# Altium PCB PWR612A.PcbDoc (part 2 of 2)
Units mil, origin at the board's own origin, x right, y up, seen from the top; angles counter-clockwise.
Board outline 6150 x 4600 mil, 4 copper layers (Top Layer, MidLayer1, MidLayer2, Bottom Layer), stack 91.2 mil thick; 131 components, 120 nets, 496 pads, 150 vias.
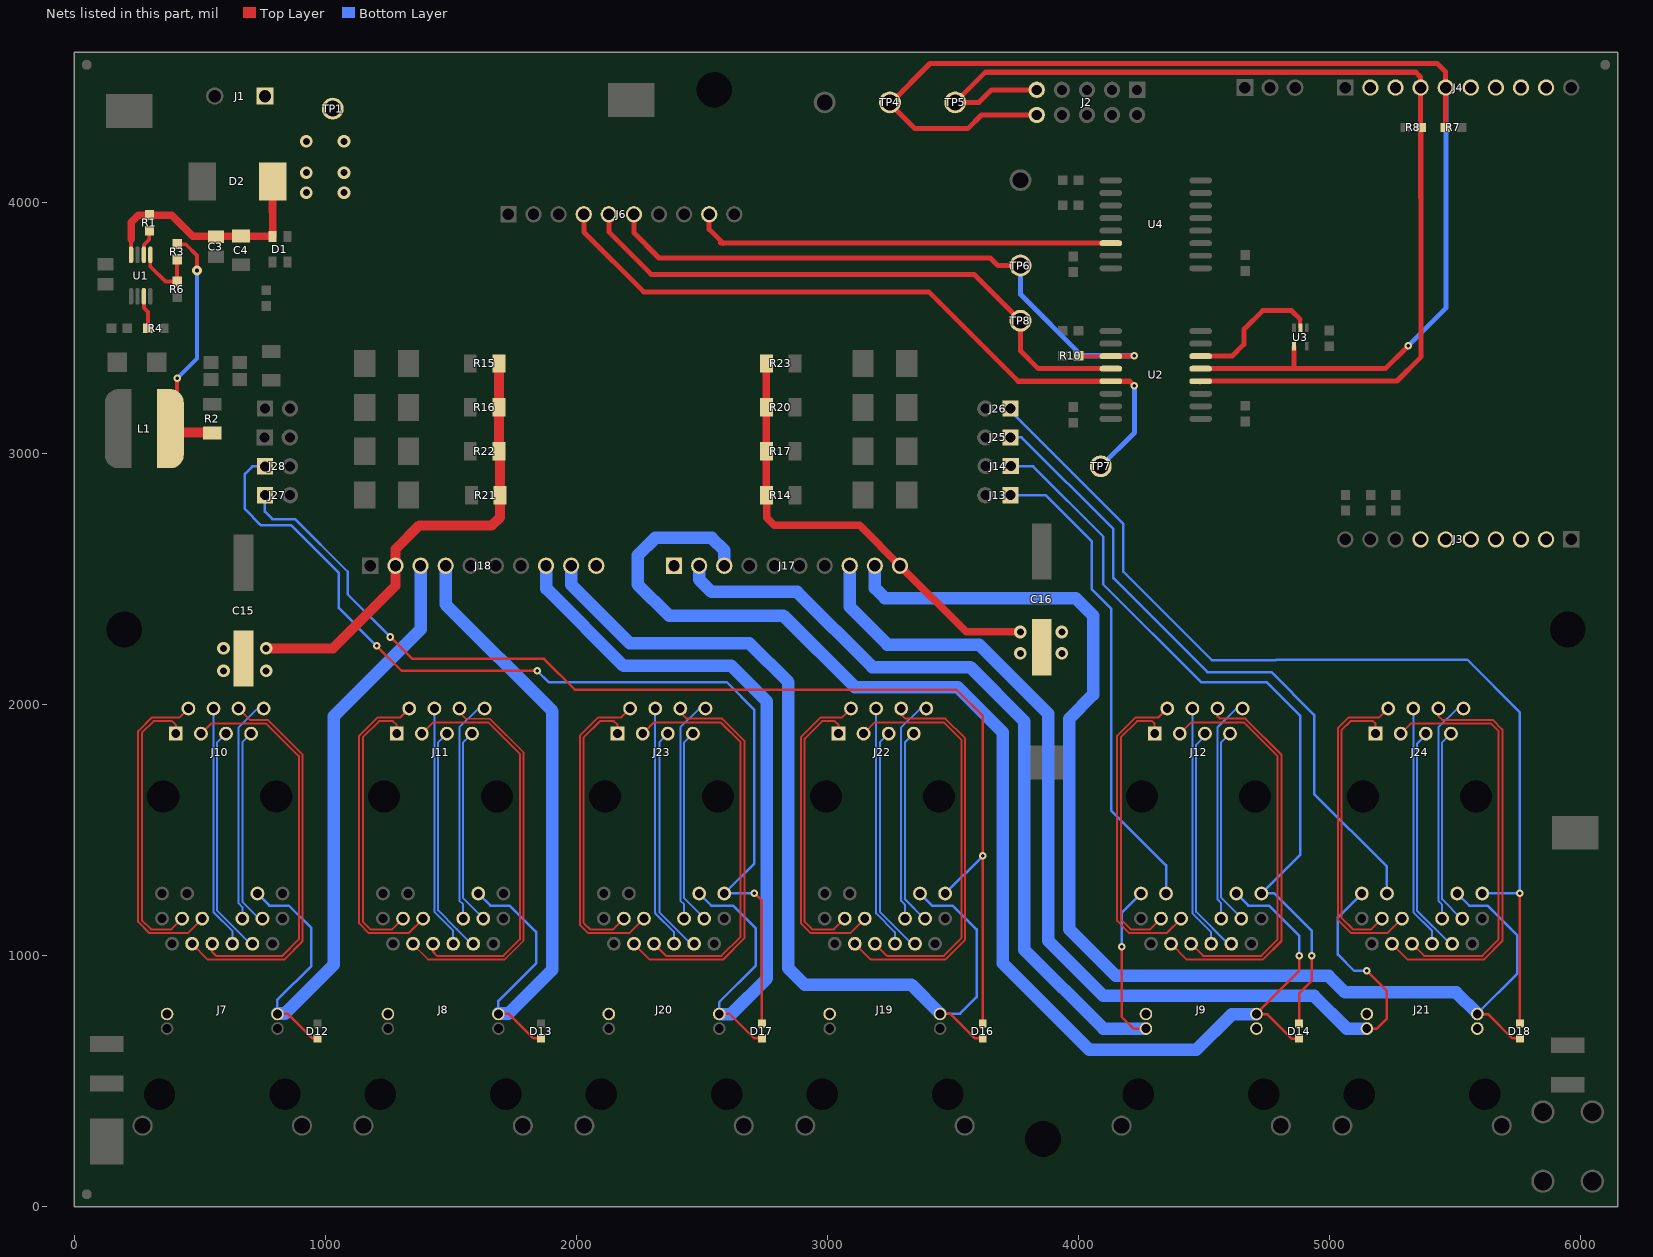
[diagram p4: the nets of this part, all layers, seen from the top]

## Via types
v1: diameter 50, hole 28, Top Layer to Bottom Layer, 108 vias
v2: diameter 30, hole 14, Top Layer to Bottom Layer, 41 vias
v3: diameter 40, hole 15, Top Layer to Bottom Layer, 1 vias

## Nets (pads, with @x,y where several pads share a name; then routed paths per layer and width w, separated by ;. In a path a pad name is that pad's centre, name@x,y a point inside that pad or via, vN(x,y) a via of type N, cw(c..) or ccw(c..) an arc to the next point about the centre after c; other vN are vias at no path point) (continued)
NetD14_1: D14.1 J9.13 J14.1 | length 3104
  Top Layer w10: D14.1@4880,729.53 4880,850 4930,900 v2(4930,1000)
  Bottom Layer w10: J14.1@3729,2950 3820,2950 4100,2670 4100,2480 4490,2090 4750,2090 4885,1955 4885,1403 J9.13@4732,1250 ; J9.13@4730,1248 J9.13@4732,1250 ; J9.13@4730,1250 J9.13@4732,1250 ; v2(4930,1000) 4930,1100 4780,1250 J9.13@4732,1250
NetD16_1: D16.1 J19.13 J27.1 | length 4752.9
  Top Layer w10: v2(1260,2270) 1347.5,2182.5 1872.5,2182.5 1995,2060 3515,2060 3620,1955 v2(3620,1398) D16.1@3620,729.53
  Bottom Layer w10: J27.1@760,2835 760,2770 790,2740 880,2740 1090,2530 1090,2440 v2(1260,2270) ; J19.13@3470,1248 v2(3620,1398)
NetD17_1: D17.1 J20.13 J28.1 | length 4110.4
  Top Layer w10: v2(1205,2235) 1305,2135 v2(1845,2135) ; v2(2710,1250) 2740,1220 D17.1@2740,729.53
  Bottom Layer w10: J28.1@760,2950 710,2950 680,2920 680,2780 745,2715 865,2715 1055,2525 1055,2385 v2(1205,2235) ; v2(1845,2135) 1890,2090 2600,2090 2710,1980 2710,1368 J20.13@2592,1250 ; J20.13@2590,1248 J20.13@2592,1250 ; J20.13@2590,1250 J20.13@2592,1250 ; v2(2710,1250) J20.13@2592,1250
NetD18_1: D18.1 J21.13 J26.1 | length 4043.7
  Top Layer w10: D18.1@5760,729.53 v2(5760,1250)
  Bottom Layer w10: J26.1@3730,3180 3730,3170 4180,2720 4180,2530 4532.5,2177.5 4787.5,2177.5 4790,2180 5550,2180 5760,1970 v2(5760,1250) 5610,1250 5611,1249 J21.13@5610,1248
NetJ9_15: J9.15 J13.1 | length 1933
  Bottom Layer w10: J13.1@3729,2850 3744,2835 3870,2835 4055,2650 4055,2460 4131.5,2383.5 4131.5,1578.5 4350,1360 J9.15@4350,1248
NetJ21_15: J21.15 J25.1 | length 2614.1
  Bottom Layer w10: J25.1@3730,3065 3775,3065 4140,2700 4140,2505 4515,2130 4770,2130 4940,1960 4940,1645 5230,1355 J21.15@5230,1248
NetL1_2: L1.2 R2.1 R3.2 | length 976.7
  Top Layer w15: L1.2@409.5,3137.94 v2@409.5,3290.14 ; R3.2@409.5,3835.14 444.18,3835.14 489.5,3789.82 v3(489.5,3729.82)
  Top Layer w40: L1.2@367.33,3085.14 R2.1@549.5,3085.14
  Bottom Layer w15: v2(410,3300) 410,3290.32 409.5,3289.82 409.5,3299.5 489.5,3379.5 v3(489.5,3729.82)
NetR1_2: R1.2 U1.6 | length 101.3
  Top Layer w15: U1.6@277.8,3792.68 277.8,3832.8 299.5,3854.5 R1.2@299.5,3885
NetR3_1: R3.1 R6.2 U1.5 | length 264.6
  Top Layer w15: U1.5@303.39,3792.68 303.39,3746.61 363.5,3686.5 R6.2@410,3686.5 R3.1@410,3773.5
NetR4_2: R4.2 U1.3 | length 134.1
  Top Layer w15: U1.3@277.8,3627.32 277.8,3581.52 280.7,3578.62 294.5,3564.82 R4.2@294.5,3500.14
P1.0: J3.2
P1.1: J3.3
P1.2: J3.4
P1.3: J3.5
P1.4: J3.6
P1.5: J3.7
P2.4: J4.2
P2.5: J4.3
PORT1_DATE1_N: J19.10 J22.2 | length 1284.6
  Top Layer w8: J22.2@3095,1985 3060,1950 2973.79,1950 2895,1871.21 2895,1128.79 2933.79,1090 3092,1090 J19.10@3150,1148
PORT1_DATE1_P: J19.11 J22.1 | length 1125.4
  Top Layer w8: J22.1@3045,1885 3045,1920 3030,1935 2980,1935 2910,1865 2910,1135 2940,1105 3027,1105 J19.11@3070,1148
PORT1_DATE2_N: J19.5 J22.6 | length 1619.3
  Top Layer w8: J19.5@3110,1048 3173,985 3471.21,985 3550,1063.79 3550,1866.21 3471.21,1945 3311.21,1945 3295,1961.21 J22.6@3295,1985
PORT1_DATE2_P: J19.4 J22.3 | length 1621.5
  Top Layer w8: J22.3@3145,1885 3190,1930 3465,1930 3535,1860 3535,1070 3465,1000 3238,1000 J19.4@3190,1048
PORT1_DATE3_N: J19.2 J22.5 | length 917.1
  Bottom Layer w8: J22.5@3245,1885 3210,1850 3210,1175 3337,1048 J19.2@3350,1048
PORT1_DATE3_P: J19.3 J22.4 | length 968.1
  Bottom Layer w8: J22.4@3195,1985 3195,1168.79 3270,1093.79 J19.3@3270,1048
PORT1_DATE4_N: J19.9 J22.8 | length 899.3
  Bottom Layer w8: J19.9@3310,1148 3310,1203.79 3295,1218.79 3295,1910 3370,1985 J22.8@3395,1985
PORT1_DATE4_P: J19.8 J22.7 | length 786.4
  Bottom Layer w8: J22.7@3345,1885 3310,1850 3310,1225 3387,1148 J19.8@3390,1148
PORT2_DATE1_N: J20.10 J23.2 | length 1290.5
  Top Layer w8: J23.2@2215,1985 2180,1950 2088.79,1950 2015,1876.21 2015,1123.79 2048.79,1090 2212,1090 J20.10@2270,1148
PORT2_DATE1_P: J20.11 J23.1 | length 1131.3
  Top Layer w8: J23.1@2165,1885 2165,1920 2150,1935 2095,1935 2030,1870 2030,1130 2055,1105 2147,1105 J20.11@2190,1148
PORT2_DATE2_N: J20.5 J23.6 | length 1604.6
  Top Layer w8: J20.5@2230,1048 2293,985 2585,985 2670,1070 2670,1856.21 2581.21,1945 2440,1945 2415,1970 J23.6@2415,1985
PORT2_DATE2_P: J20.4 J23.3 | length 1612
  Top Layer w8: J23.3@2265,1885 2310,1930 2575,1930 2655,1850 2655,1076.21 2578.79,1000 2358,1000 J20.4@2310,1048
PORT2_DATE3_N: J20.2 J23.5 | length 916.3
  Bottom Layer w8: J23.5@2365,1885 2331,1851 2331,1174 2457,1048 J20.2@2470,1048
PORT2_DATE3_P: J20.3 J23.4 | length 968.1
  Bottom Layer w8: J23.4@2315,1985 2315,1170 2316,1169 2316,1167.79 2390,1093.79 J20.3@2390,1048
PORT2_DATE4_N: J20.9 J23.8 | length 899.3
  Bottom Layer w8: J20.9@2430,1148 2430,1205 2415,1220 2415,1910 2490,1985 J23.8@2515,1985
PORT2_DATE4_P: J20.8 J23.7 | length 784.6
  Bottom Layer w8: J23.7@2465,1885 2430,1850 2430,1230 2510,1150 J20.8@2510,1148
PORT3_DATE1_N: J8.10 J11.2 | length 1287.6
  Top Layer w8: J11.2@1335,1985 1300,1950 1208.79,1950 1135,1876.21 1135,1128.79 1173.79,1090 1332,1090 J8.10@1390,1148
PORT3_DATE1_P: J8.11 J11.1 | length 1128.4
  Top Layer w8: J11.1@1285,1885 1285,1920 1270,1935 1215,1935 1150,1870 1150,1135 1180,1105 1267,1105 J8.11@1310,1148
PORT3_DATE2_N: J8.5 J11.6 | length 1586.1
  Top Layer w7: J8.5@1350,1048 1350,1045 1410,985 1415,985 1715.51,985 1790,1059.49 1790,1810.51 1656.01,1944.5 1560,1944.5 1535,1969.5 J11.6@1535,1985
PORT3_DATE2_P: J8.4 J11.3 | length 1612
  Top Layer w8: J11.3@1385,1885 1430,1930 1650,1930 1775.5,1804.5 1775.5,1065.5 1710,1000 1445,1000 1430,1015 J8.4@1430,1048
PORT3_DATE3_N: J8.2 J11.5 | length 925.5
  Bottom Layer w8: J11.5@1485,1885 1450,1850 1450,1181.21 1525,1106.21 1525,1105 1590,1040 J8.2@1590,1048
PORT3_DATE3_P: J8.3 J11.4 | length 968.1
  Bottom Layer w8: J11.4@1435,1985 1435,1175 1510,1100 J8.3@1510,1048
PORT3_DATE4_N: J8.9 J11.8 | length 899.3
  Bottom Layer w8: J8.9@1550,1148 1550,1205 1535,1220 1535,1910 1610,1985 J11.8@1635,1985
PORT3_DATE4_P: J8.8 J11.7 | length 784.6
  Bottom Layer w8: J11.7@1585,1885 1550,1850 1550,1230 1630,1150 J8.8@1630,1148
PORT4_DATE1_N: J7.10 J10.2 | length 1290.8
  Top Layer w8: J10.2@445,1985 445,1975 420,1950 310,1950 255,1895 255,1135 300,1090 452,1090 J7.10@510,1148
PORT4_DATE1_P: J7.11 J10.1 | length 1135.7
  Top Layer w8: J10.1@405,1885 405,1920 390,1935 316.21,1935 270,1888.79 270,1141.21 306.21,1105 387,1105 J7.11@430,1148
PORT4_DATE2_N: J7.5 J10.6 | length 1570.2
  Top Layer w8: J7.5@470,1048 533,985 836.21,985 910,1058.79 910,1801.21 771.21,1940 700,1940 J10.6@655,1985
PORT4_DATE2_P: J7.4 J10.3 | length 1601.6
  Top Layer w8: J10.3@505,1885 545,1925 765,1925 895,1795 895,1065 830,1000 565,1000 550,1015 J7.4@550,1048
PORT4_DATE3_N: J7.2 J10.5 | length 914.2
  Bottom Layer w8: J10.5@605,1885 570,1850 570,1180 702,1048 J7.2@710,1048
PORT4_DATE3_P: J7.3 J10.4 | length 969.3
  Bottom Layer w8: J10.4@555,1985 555,1173.79 631.44,1097.35 631.44,1049.44 J7.3@630,1048
PORT4_DATE4_N: J7.9 J10.8 | length 899.3
  Bottom Layer w8: J7.9@670,1148 670,1193.79 655,1208.79 655,1910 730,1985 J10.8@755,1985
PORT4_DATE4_P: J7.8 J10.7 | length 792.2
  Bottom Layer w8: J10.7@705,1885 670,1850 670,1215 737,1148 J7.8@750,1148
PORT6&5_DATA1_N: J21.10 J24.2 | length 1296.4
  Top Layer w8: J24.2@5235,1985 5200,1950 5078.79,1950 5035,1906.21 5035,1143.79 5088.79,1090 5232,1090 J21.10@5290,1148
PORT6&5_DATA1_P: J21.11 J24.1 | length 1140.1
  Top Layer w8: J24.1@5185,1885 5185,1925 5175,1935 5085,1935 5050,1900 5050,1150 5095,1105 5167,1105 J21.11@5210,1148
PORT6&5_DATA2_N: J21.5 J24.6 | length 1646.4
  Top Layer w8: J21.5@5250,1048 5313,985 5616.21,985 5690,1058.79 5690,1901.21 5651.21,1940 5450,1940 5435,1955 J24.6@5435,1985
PORT6&5_DATA2_P: J21.4 J24.3 | length 1640.8
  Top Layer w8: J24.3@5285,1885 5325,1925 5645,1925 5675,1895 5675,1065 5610,1000 5378,1000 J21.4@5330,1048
PORT6&5_DATA3_N: J21.2 J24.5 | length 914.2
  Bottom Layer w8: J24.5@5385,1885 5385,1880 5350,1845 5350,1180 5482,1048 J21.2@5490,1048
PORT6&5_DATA3_P: J21.3 J24.4 | length 968.1
  Bottom Layer w8: J24.4@5335,1985 5335,1173.79 5410,1098.79 J21.3@5410,1048
PORT6&5_DATA4_N: J21.9 J24.8 | length 899.3
  Bottom Layer w8: J21.9@5450,1148 5450,1203.79 5435,1218.79 5435,1910 5510,1985 J24.8@5535,1985
PORT6&5_DATA4_P: J21.8 J24.7 | length 786.4
  Bottom Layer w8: J24.7@5485,1885 5450,1850 5450,1225 5527,1148 J21.8@5530,1148
PORT8&7_DATA1_N: J9.10 J12.2 | length 1281.7
  Top Layer w8: J12.2@4355,1985 4320,1950 4228.79,1950 4155,1876.21 4155,1138.79 4203.79,1090 4352,1090 J9.10@4410,1148
PORT8&7_DATA1_P: J9.11 J12.1 | length 1125.4
  Top Layer w8: J12.1@4305,1885 4305,1925 4295,1935 4235,1935 4170,1870 4170,1145 4210,1105 4287,1105 J9.11@4330,1148
PORT8&7_DATA2_N: J9.5 J12.6 | length 1587.8
  Top Layer w8: J9.5@4370,1048 4433,985 4736.21,985 4810,1058.79 4810,1801.21 4666.21,1945 4565,1945 4555,1955 J12.6@4555,1985
PORT8&7_DATA2_P: J9.4 J12.3 | length 1586.4
  Top Layer w8: J12.3@4405,1885 4450,1930 4660,1930 4795,1795 4795,1065 4730,1000 4498,1000 J9.4@4450,1048
PORT8&7_DATA3_N: J9.2 J12.5 | length 917.1
  Bottom Layer w8: J12.5@4505,1885 4505,1875 4470,1840 4470,1175 4597,1048 J9.2@4610,1048
PORT8&7_DATA3_P: J9.3 J12.4 | length 968.1
  Bottom Layer w8: J12.4@4455,1985 4455,1168.79 4530,1093.79 J9.3@4530,1048
PORT8&7_DATA4_N: J9.9 J12.8 | length 899.3
  Bottom Layer w8: J9.9@4570,1148 4570,1210 4555,1225 4555,1910 4630,1985 J12.8@4655,1985
PORT8&7_DATA4_P: J9.8 J12.7 pad.StartPad | length 783.8
  Bottom Layer w8: 4570,1231.21 4570,1850 J12.7@4605,1885 ; 4570.61,1230.61 4583.21,1218 4650,1151.21 J9.8@4650,1148
PSE_A3: J6.9 U4.14 | length 1683
  Top Layer w20: J6.9@2530,3954 2530,3894 2585.6,3838.41 ; 2575.6,3840 U4.14@4120,3840
PSE_N1: D16.2 J18.9 J19.14 J19.17 | length 3858.1
  Top Layer w10: J19.17@3450,770 3490,770 3589.53,670.47 D16.2@3620,670.47
  Bottom Layer w10: J19.14@3370,1248 3418,1200 3500,1200 3595,1105 3595,835 3530,770 J19.17@3450,770
  Bottom Layer w50: J18.9@1980,2554 1980,2479 2214,2245 2690,2245 2845,2090 2845,950 2910,885 3335,885 J19.17@3450,770
PSE_N2: D17.2 J18.8 J20.14 J20.17 | length 3397.4
  Top Layer w10: J20.17@2570,770 2610,770 2709.53,670.47 D17.2@2740,670.47
  Bottom Layer w10: J20.14@2490,1248 2538,1200 2625,1200 2715,1110 2715,960 2570,815 J20.17@2570,770
  Bottom Layer w50: J18.8@1881,2554 1881,2463 2189,2155 2618.61,2155 2760,2013.61 2760,910 2617,767 J20.17@2575,767
PSE_N3: D13.2 J8.14 J8.17 J18.4 | length 2964.3
  Top Layer w10: J8.17@1690,770 1730,770 1829.53,670.47 D13.2@1860,670.47
  Bottom Layer w10: J8.14@1610,1248 1658,1200 1735,1200 1840,1095 1840,970 1690,820 J8.17@1690,770
  Bottom Layer w50: J18.4@1480,2554 1480,2400 1905,1975 1905,945 1730,770 J8.17@1690,770
PSE_N4: D12.2 J7.14 J7.17 J18.3 | length 2907.4
  Top Layer w10: J7.17@810,770 850,770 949.53,670.47 D12.2@970,670.47
  Bottom Layer w10: J7.14@730,1248 778,1200 855,1200 945,1110 945,960 810,825 J7.17@810,770
  Bottom Layer w50: J7.17@810,770 840,770 1035,965 1035,1955 1381,2301 J18.3@1381,2554
PSE_N5: D18.2 J17.9 J21.14 J21.17 | length 4953.9
  Top Layer w10: J21.17@5590,768 5632,768 5729.53,670.47 D18.2@5760,670.47
  Bottom Layer w10: J21.14@5510,1248 5558,1200 5630,1200 5750,1080 5750,930 J21.17@5590,770
  Bottom Layer w50: J17.9@3190,2553.99 3190,2465 3230,2425 3990,2425 4060,2355 4060,2040 3965,1945 3965,1105 4150,920 4998,920 5064,854 5506,854 J21.17@5590,770
PSE_N6: J17.8 J21.16 J21.20 | length 4194
  Top Layer w10: J21.20@5150,710 5190,710 5230,750 5230,860 v2(5150,940)
  Bottom Layer w10: J21.16@5130,1248 5035,1153 5035,1005 5100,940 v2(5150,940)
  Bottom Layer w50: J17.8@3090,2553.99 3090,2390 3240,2240 3605,2240 3880,1965 3880,1060 4100,840 4940,840 5070,710 J21.20@5150,710
PSE_N7: D14.2 J9.14 J9.17 J17.3 | length 5311.4
  Top Layer w10: J9.17@4710,768 4752,768 4850,670 D14.2@4880,670 ; J9.17@4710,770 4880,940 v2(4880,1000)
  Bottom Layer w10: J9.14@4630,1248 4678,1200 4760,1200 4880,1080 v2(4880,1000)
  Bottom Layer w50: J17.3@2590,2555 2590,2615 2540,2665 2315,2665 2245,2595 2245,2480 2370,2355 2825,2355 3110,2070 3520,2070 3700,1890 3700,970 4045,625 4470,625 4612,767 J9.17@4710,767
PSE_N8: J9.16 J9.20 J17.2 | length 3755.7
  Top Layer w10: v2(4172.98,1036.89) 4172.98,757.02 4220,710 J9.20@4270,710
  Bottom Layer w10: v2(4172.98,1036.89) 4172.98,1170.98 J9.16@4250,1248
  Bottom Layer w50: J17.2@2485,2560 J17.2@2490.5,2554.5 ; J17.2@2490,2553.99 2490,2500 2540,2450 2880,2450 3180,2150 3570,2150 3785,1935 3785,1025 4100,710 J9.20@4270,710
PSE_SCL: J6.4 TP7.1 U2.13 | length 2893.9
  Top Layer w20: J6.4@2031,3954 2031,3882.99 2268.99,3645 3405,3645 3761.09,3288.91 U2.13@4130,3288.91 4205.73,3288.91 v2(4224.14,3270.5)
  Bottom Layer w20: TP7.1@4090,2950 4224.14,3084.14 v2(4224.14,3270.5)
PSE_SDAI: J6.5 TP8.1 U2.12 | length 2366.1
  Top Layer w20: J6.5@2130,3954 2130,3883.99 2298.99,3715 3410,3715 3585,3715 TP8.1@3770,3530 3770,3410 3841.09,3338.91 U2.12@4130,3338.91
PSE_SDAO: J6.6 R10.1 TP6.1 U2.11 | length 2551.7
  Top Layer w15: R10.1@4009.14,3388.91 U2.11@4130,3388.91
  Top Layer w20: J6.6@2230,3954 2230,3880 2330,3780 3650,3780 3680,3750 TP6.1@3770,3750 ; U2.11@4130,3388.91 v2@4222.55,3388.91
  Bottom Layer w20: TP6.1@3770,3750 3770,3635 4014.5,3390.5 v2(4224.14,3390.5)
PSE_SDAO2: U2.6 U3.2 | length 550.3
  Top Layer w15: U3.2@4884.28,3505 4884.28,3535.72
  Top Layer w20: U2.6@4488.27,3388.91 4612.55,3388.91 4660,3436.37 4660,3495 4735,3570 4850,3570 4884.28,3535.72
RST/SBWTDIO: J4.6
SCL: J2.9 J4.4 R8.1 TP5.1 U2.4 | length 4645.6
  Top Layer w20: 3560,4450 TP5.1@3510,4400 ; J2.9@3835,4450 3655,4450 3605,4400 TP5.1@3510,4400 ; U2.4@4485,3285 4490,3290 5270,3290 5366.5,3386.5 R8.1@5366.5,4300 ; 5364.14,4020.5 J4.4@5364.14,4458.91 5364.14,4500.86 5345,4520 3630,4520 TP5.1@3510,4400
SDA: J2.10 J4.5 R7.1 TP4.1 U2.5 U3.4 | length 5198.5
  Top Layer w20: J2.10@3835,4350 3615,4350 3560,4295 3350,4295 3250,4395 3410,4555 5430,4555 5464.14,4520.86 J4.5@5464.14,4458.91 ; U2.5@4488.27,3338.91 4860,3338.91 ; U3.4@4860,3425 4860,3340 4858.91,3338.91 5223.91,3338.91 v2@5310,3425 ; R7.1@5463.5,4300 5463.5,4453.5 J4.5@5465,4455
  Bottom Layer w20: v2(5315,3430) 5465,3580 J4.5@5465,4460
TEST/SBWTCK: J4.7
VPWR: C3.1 C4.1 C15.1 C16.1 D1.4 D2.1 J1.1 J7.18 J8.18 J9.18 J9.19 J17.1 J17.10 J18.2 J18.10 J19.18 J20.18 J21.18 J21.19 R1.1 R14.1 R15.1 R16.1 R17.1 R20.1 R21.1 R22.1 R23.1 TP1.1 U1.8 | length 4749
  Top Layer w15: U1.8@226.61,3792.68 226.61,3855
  Top Layer w30: 226.61,3855 226.61,3921.61 255,3950 389.32,3950 472.59,3866.73 C4.1@665,3866.73 ; 746.4,3866.73 C4.1@665,3866.73 ; 790,3965 790,4000 ; D1.4@790.47,3866.18 665.55,3866.18 C4.1@665,3866.73 ; D1.4@790.47,3866.18 D2.1@790.49,4085 ; R23.1@2757.91,3360 R20.1@2757.91,3185 R17.1@2757.91,3010 R14.1@2757.91,2835 2760,2832.91 2760,2745 2790,2715 3128.99,2715 J17.10@3290,2553.99 3553.99,2290 v1(3770,2290)
  Top Layer w40: v1(765,2225) 1031.01,2225 1280,2473.99 J18.2@1280,2541.99 ; J18.2@1288,2549.99 J18.2@1280,2541.99 ; R15.1@1692.09,3360 R16.1@1692.09,3185 R22.1@1692.09,3010 1697.09,3005 R21.1@1697.09,2835 1697.09,2747.09 1665,2715 1375,2715 1280,2620 J18.2@1280,2554 J18.2@1280,2541.99
  other v1: 595,2135 765,2135 3770,2205 3935,2205 595,2225 3935,2290 925,4040 1075,4040 925,4120 1075,4120 925,4245 1075,4245
XIN: J4.9
XOUT: J4.8
pads on no net: D1.1 D1.3 FID1.1 FID2.1 FID3.1 H1.0 H2.0 H3.0 H4.0 H5.0 H6.0 H7.0 H8.0 H9.0 H10.0 H10.MH H11.0 H11.MH H12.0 H12.MH H13.0 H13.MH J2.2 J2.8 J7.1 J7.6 J7.7 J7.12 J7.15 J7.16 J7.19 J7.20 J7.MH1 J7.MH2 J8.1 J8.6 J8.7 J8.12 J8.15 J8.16 J8.19 J8.20 J8.MH1 J8.MH2 J9.1 J9.6 J9.7 J9.12 J9.MH1 J9.MH2 J10.MH1 J10.MH2 J11.MH1 J11.MH2 J12.MH1 J12.MH2 J19.1 J19.6 J19.7 J19.12 J19.15 J19.16 J19.19 J19.20 J19.MH1 J19.MH2 J20.1 J20.6 J20.7 J20.12 J20.15 J20.16 J20.19 J20.20 J20.MH1 J20.MH2 J21.1 J21.6 J21.7 J21.12 J21.MH1 J21.MH2 J22.MH1 J22.MH2 J23.MH1 J23.MH2 J24.MH1 J24.MH2 SH-J1.0 SH-J2.0 SH-J3.0 SH-J4.0 SH-J5.0 SH-J6.0 SH-J7.0 SH-J8.0 U2.7 U2.10 U3.1 U4.7 U4.10 U4.12
copper on no net:
  other v1: 410,3420 710,3530 630,3610

## Polygon pours and split planes (outlines as drawn)
EARTH on Top Layer "Top Layer-No Net" (solid, remove dead copper, pour order 24): 210,150 210,520 50,520 50,150
EARTH on Top Layer "Top Layer-No Net" (solid, remove dead copper, pour order 25): 6120,45 6120,530 5480,530 5480,45
GND on Top Layer "GND-Top-C9" (solid, remove dead copper, pour order 28): 3720,2485 3720,2590 3720,2740 3740,2740 3985,2740 3985,2680 3985,2485
VPWR on Top Layer "VPWR-Top-C9" (solid, remove dead copper, pour order 40): 3985,2355 3720,2355 3720,2260 3720,2225 3720,2100 3840,2100 3985,2100
GND on Top Layer "GND-Top-C21" (solid, remove dead copper, pour order 39): 800,2430 800,2680 550,2680 550,2430
VPWR on Top Layer "VPWR-Top-C21" (solid, remove dead copper, pour order 37): 550,2300 800,2300 800,2050 550,2050
GND on Top Layer "GND-Top2" (solid, remove dead copper, pour order 26): 835,3330 400,3330 365,3295 335,3295 250,3295 250,3445 335,3445 335,3535.14 335,3590 295,3590 295,3670 360,3670 360,3645 535,3645 535,3825 710,3825 710,3605 710,3600 835,3600 835,3330
GND on Top Layer "GND-Top1" (solid, remove dead copper, pour order 27): 80,3985 80,4500 625,4500 625,3985 80,3985
VPWR on Top Layer "VPWR-Top1" (solid, remove dead copper, pour order 38): 675,3985 1145,3985 1145,4500 675,4500 675,3985
3.3V_USB on MidLayer2 "MidLayer1-No Net 1" (solid, remove dead copper, pour order 41): 6118.3,2601.89 4348.3,2601.89 4348.3,4251.89 2918.3,4251.89 2918.3,4571.89 6118.3,4571.89
GND on MidLayer2 "GND-Mid2-Port5&4" (solid, remove dead copper, pour order 35): 5005,2045 5005,950 5725,950 5725,2045 5005,2045
GND on MidLayer2 "GND-Mid2-Port7&6" (solid, pour order 36): 4125,2045 4125,950 4255,950 4845,950 4845,999.52 4845,2045 4125,2045
GND on MidLayer2 "GND-Mid2-Port0" (solid, remove dead copper, pour order 31): 2865,2045 2865,950 3585,950 3585,972.01 3585,988.52 3585,2045 2865,2045
GND on MidLayer2 "GND-Mid2-Port1" (solid, remove dead copper, pour order 32): 1985,2045 1985,950 2705,950 2705,972.01 2705,1214.12 2705,2045 1985,2045
GND on MidLayer2 "GND-Mid2-Port2" (solid, remove dead copper, pour order 33): 1101.8,2044.27 1101.8,954.27 1821.8,954.27 1821.8,976.18 1821.8,2044.27 1101.8,2044.27
GND on MidLayer2 "GND-Mid2-Port3" (solid, remove dead copper, pour order 34): 225,2045 225,950 945,950 945,2045 225,2045
VPWR on MidLayer2 "MidLayer2-VPWR" (solid, remove dead copper, pour order 23): 30,580 6120,580 6120,2540.17 4260,2540.17 4260,4171.99 2850,4171.99 2850,4570 30,4570
EARTH on MidLayer2 "MidLayer2-CHPT3&2" (solid, remove dead copper, pour order 30): 30,530 30,30 6100,30 6100,530
GND1 on MidLayer1 "MidLayer1-No Net 1" (solid, remove dead copper, pour order 42): 6120,2600 4350,2600 4350,4250 2920,4250 2920,4570 6120,4570
GND on MidLayer1 "MidLayer1-GND" (solid, remove dead copper, pour order 22): 32.28,580 6122.28,580 6122.28,2541.16 4262.28,2541.16 4262.28,4173.8 2852.28,4173.8 2852.28,4572 32.28,4572
EARTH on MidLayer1 "MidLayer1-CHPT3&2" (solid, remove dead copper, pour order 29): 30,530 30,30 6100,30 6100,530

## Keep-outs
Keep-Out Layer:
  the board outline again, w10
  text ".Layer_Name" at 577,-858.49 h60

## Other copper
Top Layer:
  text ".Layer_Name" at 577,-858.49 h60
Bottom Layer:
  text ".Layer_Name" at 577,-858.49 h60

## Silkscreen, mask and mechanical layers (free items; w line width, h text height)
Top Overlay:
  lines w10: 1000,2750 1000,2353.99 3500,2353.99 3500,2750 ; 1000,3600 1000,4203.99 3500,4203.99 3500,3600 ; 4564.14,2558.91 6124.14,2558.91 6124.14,4435.86 6001.09,4558.91 4564.14,4558.91 4564.14,2558.91
  text "(-)" at 300,4510 h60
  text "(+)" at 890,4510 h60
  text "PWR612 Rev A" at 1345,4380 h60
  text "GND" at 2140,4250 h60
  text "MSP-EXP430G2 LaunchPad" at 5475,4140 h60 r270
  text "48V" at 980,3730 h60 r90
  text "TPS23861EVM-613 Daughter Board" at 1330,3530 h60
  text "Port LEDs" at 75,2805 h60
  text "Port LEDs" at 3905,2760 h60
  text "2P4 2P3     2P2 2P1" at 1315,2410 h40
  text "4P2B 4P2A  4P1B 4P1A" at 2465,2405 h40
  text "2014" at 5499,2260 h60
  text "TPS23861EVM-612" at 4605,2140 h60
  text "Data IN" at 110,1830 h60 r90
  text "Data IN" at 6100,1830 h60 r90
  text "GND" at 3780,1595 h60
  text "GND" at 5900,1315 h60
  text "Power&Data OUT" at 90,830 h60 r90
  text "Power&Data OUT" at 6110,475 h60 r90
  text "2B" at 4130,50 h60 r90
  text "2A" at 4900,50 h60 r90
  text "1B" at 5020,50 h60 r90
  text "1A" at 5770,50 h60 r90
  text ".Layer_Name" at 577,-858.49 h60
Bottom Overlay:
  text ".Layer_Name" at 577,-858.49 h60
Top Paste:
  text ".Layer_Name" at 577,-858.49 h60
Bottom Paste:
  text ".Layer_Name" at 577,-858.49 h60
Top Solder:
  text ".Layer_Name" at 577,-858.49 h60
  text ".Layer_Name" at 577,-858.49 h60
Bottom Solder:
  text ".Layer_Name" at 577,-858.49 h60
Drill Guide:
  text ".Layer_Name" at 577,-858.49 h60
M1 Board Outline:
  the board outline again, w10
  text ".Layer_Name" at 577,-858.49 h60
M2 Board Dimensions:
  text ".Layer_Name" at 577,-858.49 h60
M3 3D STEP Top:
  text ".Layer_Name" at 577,-858.49 h60
M4 3D STEP Bottom:
  text ".Layer_Name" at 577,-858.49 h60
M5 Assembly Top:
  lines w10: -292,-930.17 6308,-930.17 ; -292,-726.83 6310,-726.83 ; -292,-523.5 -292,-1133.5 3713,-1133.5 6310,-1133.5 6310,-523.5 -291.5,-523.5 -291.5,-1133.5 1284,-1133.5 ; 2173,-1133.5 2173,-523.5 ; 3440,-726.83 3440,-523.5 ; 4280,-726.83 4280,-523.5 ; 4902,-1140 4902,-937.17
  text "COMPONENTS MARKED 'DNP' SHOULD NOT BE POPULATED." at 1153.5,-318.5 h60
  text "ASSEMBLY VARIANT:" at 1153,-434 h60
  text ".VariantName" at 2189,-434 h60
  text "PCB VIEWED FROM TOP SIDE" at -228.5,-655.67 h60
  text "BOARD #:" at 2248,-655.67 h60
  text ".PRJ_Number" at 2793.5,-655.67 h60
  text "REV:" at 3638,-655.67 h60
  text ".PCB_Rev" at 3929.5,-655.67 h60
  text "SVN REV:" at 4476,-655.67 h60
  text ".VersionControl_RevNumber" at 4982,-655.67 h60
  text "IGNORE ->" at -228.5,-858.49 h60
  text "PLOT NAME =" at -228.5,-1064.34 h60
  text ".plot_File_Name" at 577,-1064.34 h60
  text "GENERATED    :" at 2250,-1064.34 h60
  text ".Print_Date" at 3119.5,-1064.34 h60
  text ".Print_Time" at 3848.5,-1064.34 h60
  text "TEXAS INSTRUMENTS" at 5113,-1064.34 h60
M6 Assembly Bottom:
  lines w10: -292.5,-727.33 6309.5,-727.33 ; -290.5,-930.67 6309.5,-930.67 ; 1115.5,-1140.5 1115.5,-937.67 ; 1737.5,-727.33 1737.5,-524 ; 2577.5,-727.33 2577.5,-524 ; 3844.5,-1134 3844.5,-524 ; 4733.5,-1134 6309,-1134 6309,-524 -292.5,-524 -292.5,-1134 2304.5,-1134 6309.5,-1134 6309.5,-524
  text "COMPONENTS MARKED 'DNP' SHOULD NOT BE POPULATED." at 6102,-318 h60
  text ".VariantName" at 5058,-434 h60
  text "ASSEMBLY VARIANT:" at 6097,-434 h60
  text ".VersionControl_RevNumber" at 1035.5,-656.17 h60
  text "SVN REV:" at 1541.5,-656.17 h60
  text ".PCB_Rev" at 2088,-656.17 h60
  text "REV:" at 2379.5,-656.17 h60
  text ".PRJ_Number" at 3224,-656.17 h60
  text "BOARD #:" at 3769.5,-656.17 h60
  text "PCB VIEWED FROM BOTTOM SIDE" at 6246,-656.17 h60
  text "IGNORE ->" at 2547.85,-858.49 h60
  text "TEXAS INSTRUMENTS" at 904.5,-1064.84 h60
  text ".Print_Time" at 2169,-1064.84 h60
  text ".Print_Date" at 2898,-1064.84 h60
  text "GENERATED    :" at 3767.5,-1064.84 h60
  text ".plot_File_Name" at 5440.5,-1064.84 h60
  text "PLOT NAME =" at 6246,-1064.84 h60
M9 Title Sheet:
  drawing of 57 lines, arcs and shapes, not listed
  text "1" at 739.84,8036.5 h70
  text "2" at 3235.5,8036.5 h70
  text "3" at 5724.84,8036.5 h70
  text "4" at 8231.51,8036.5 h70
  text "5" at 10730.5,8036.5 h70
  text "6" at 13235.5,8036.5 h70
  text "A" at -416.5,6893.5 h70
  text "A" at 14383.5,6893.5 h70
  text "B" at -416.5,4513.5 h70
  text "B" at 14383.5,4513.5 h70
  text "C" at -416.5,2138.5 h70
  text "C" at 14383.5,2138.5 h70
  text "PROJECT TITLE:" at 11343.5,277.5 h45
  text ".PRJ_Title" at 11393.5,144.17 h70
  text "DESIGNED FOR:" at 11343.5,-23.5 h45
  text ".PRJ_Customer" at 11393.5,-163.5 h70
  text "D" at -416.5,-231.5 h70
  text "D" at 14383.5,-231.5 h70
  text "FILE NAME:" at 11343.5,-323.5 h45
  text ".PCB_File_Name_No_Path" at 11393.5,-443.5 h70
  text "Texas Instruments (TI) and/or its licensors do not warrant the accuracy or completeness of this specification" at 6374,-605.34 h45
  text "ENGINEER:" at 11343.5,-613.5 h45
  text "LAYOUT BY:" at 12848.5,-613.5 h45
  text "or any information contained therein. TI and/or its licensors do not warrant that this design will meet" at 6329.01,-718 h45
  text ".PRJ_Engineer" at 11393.5,-768.49 h70
  text ".PCB_Layout" at 12899,-768.49 h70
  text "the specifications, will be suitable for your application or fit for any particular purpose, or will operate in" at 6329.01,-830.67 h45
  text ".Layer_Name" at 577,-858.49 h60
  text "ALTIUM DESIGNER VERSION:" at 12848.5,-923.5 h45
  text "an implementation. TI and/or its licensors do not warrant that the design is production worthy. You should" at 6329.01,-943.33 h45
  text "completely validate and test your design implementation to confirm the system functionality for your application." at 6374,-1056 h45
  text ".print_Scale" at 11393.5,-1056.83 h70
  text ".Application_BuildNumber" at 12899,-1056.83 h70
  text "1" at 739.84,-1263.5 h70
  text "2" at 3235.5,-1263.5 h70
  text "3" at 5724.84,-1263.5 h70
  text "4" at 8231.51,-1263.5 h70
  text "5" at 10730.5,-1263.5 h70
  text "6" at 13235.5,-1263.5 h70
M10 Fab Notes:
  drawing of 217 lines, arcs and shapes, not listed
  text "Layer Stack Up Detail for: PWR612A.PcbDoc" at 11360,7843.75 h52
  text "Layer" at 11360,7771.2 h27
  text "Gerber" at 12366.46,7771.2 h27
  text "Copper" at 13006.23,7771.2 h27
  text "Dielectric" at 13690.1,7771.2 h27
  text "Name" at 11360,7717.2 h27
  text "Document" at 12366.46,7717.2 h27
  text "Thickness" at 13006.23,7717.2 h27
  text "Material" at 13690.1,7717.2 h27
  text "Top Solder Mask" at 11360,7641.88 h38
  text "(.GTS)" at 12366.46,7641.88 h38
  text "Solder Resist" at 13690.1,7641.88 h38
  text "Top Layer" at 11360,7535.62 h38
  text "(.GTL)" at 12366.46,7535.62 h38
  text "2mil" at 13006.23,7535.62 h38
  text "FR-4" at 13690.1,7482.5 h38
  text "MidLayer1" at 11360,7429.38 h38
  text "(.G1)" at 12366.46,7429.38 h38
  text "1.4mil" at 13006.23,7429.38 h38
  text "FR-4" at 13690.1,7376.25 h38
  text "MidLayer2" at 11360,7323.12 h38
  text "(.G2)" at 12366.46,7323.12 h38
  text "1.4mil" at 13006.23,7323.12 h38
  text "FR-4" at 13690.1,7270 h38
  text "Bottom Layer" at 11360,7216.88 h38
  text "(.GBL)" at 12366.46,7216.88 h38
  text "2mil" at 13006.23,7216.88 h38
  text "Bottom Solder Mask" at 11360,7110.62 h38
  text "(.GBS)" at 12366.46,7110.62 h38
  text "Solder Resist" at 13690.1,7110.62 h38
  text "DESIGN INFORMATION" at 12381.02,6810 h60
  text "(REFER ALSO ARRAY/PANEL PROFILING INFORMATION)" at 12019.46,6648.29 h60
  text "BOARD SIZE" at 11333.46,6644 h60
  text "6150MIL" at 11795.78,6516.18 h60
  text "X" at 12301.46,6516.18 h60
  text "4600MIL" at 12532.78,6516.18 h60
  text "Number of Layers :" at 11736.46,6319 h60
  text "4" at 12831.27,6309 h60
  text "MIN. TRACK WIDTH:" at 11736.46,6180 h60
  text "8" at 12832.7,6180 h60
  text "MIL" at 12987.46,6180 h60
  text "MIN. CLEARANCE:" at 11736.46,6048 h60
  text "8" at 12832.7,6048 h60
  text "MIL" at 12987.46,6048 h60
  text "MIN. VIA PAD SIZE:" at 11736.46,5916 h60
  text "24" at 12802.71,5916 h60
  text "MIL" at 12987.46,5916 h60
  text "0.05mm (2MIL)" at 12431.46,5774.29 h60
  text "MINIMUM ANNULAR RING" at 11407.23,5770 h60
  text "EXTERNAL" at 13139.46,5770 h60
  text "PER" at 11607.23,5652 h60
  text "IPC-D-275 CLASS 2 LEVEL C" at 11827.23,5652 h60
  text "MIL, HOLES" at 13315.46,5539.71 h60
  text "+/-" at 12923,5539 h60
  text "+/-" at 13777,5539 h60
  text "REGISTRATION TOLERANCES:" at 11407.23,5534 h60
  text "METAL" at 12607,5534 h60
  text "5" at 13183.2,5534 h60
  text "3" at 14016.2,5534 h60
  text "MIL" at 14132.46,5534 h60
  text "MATERIAL:" at 11332.46,5324.54 h60
  text "FR-4 High Tg" at 12318.9,5184.21 h60
  text "FR-4" at 11793.46,5175.64 h60
  text "X" at 12165.46,5175.64 h60
  text "OTHER" at 13241.46,5175.64 h60
  text "62 MIL (1.6mm) +/-10%" at 12073.56,5012.92 h60
  text "THICKNESS:" at 11407.23,5008.64 h60
  text "X" at 11945.4,5008.64 h60
  text "OTHER" at 13358.46,5008.64 h60
  text "TOLERANCE:" at 11407.23,4850.64 h60
  text "X" at 12246.53,4850.64 h60
  text "ANSI IPC-6012 TYPE 3 CLASS 2" at 12433.48,4850.64 h60
  text "OTHER +/-" at 12433.46,4694.64 h60
  text "BOW & TWIST:" at 11407.23,4537.64 h60
  text "X" at 12246.53,4537.64 h60
  text "ANSI IPC-6012 TYPE 3 CLASS 2" at 12433.48,4537.64 h60
  text "OTHER +/-" at 12433.46,4379.13 h60
  text "COPPER THICKNESS (FINISHED):" at 11332.46,4243.64 h60
  text "1.4MIL (1oz)" at 12212.46,4090.92 h60
  text "2MIL (1.4oz)" at 12979.46,4090.92 h60
  text "2.8MIL (2oz)" at 13706.46,4090.92 h60
  text "OUTER:" at 11689.46,4086.64 h60
  text "X" at 12860,4085 h60
  text "1.4MIL (1oz)" at 12212.46,3933.92 h60
  text "2.8MIL (2oz)" at 12979.46,3933.92 h60
  text "N/A" at 13706,3934.29 h60
  text "INNER SIGNAL:" at 11400.38,3929.64 h60
  text "X" at 12085,3925 h60
  text "DRILLING:" at 11332.46,3790.64 h60
  text "REFERENCE:" at 11407.23,3673.64 h60
  text "X" at 12055.46,3673.64 h60
  text "AS SHOWN" at 12242.46,3673.64 h60
  text "X" at 12956.46,3673.64 h60
  text "NC_DRILL FILES" at 13093.46,3673.64 h60
  text "PTH MIN COPPER THICKNESS:" at 11407.23,3515.64 h60
  text "X" at 12757.46,3515.64 h60
  text "1MIL" at 12894.46,3515.64 h60
  text "OTHER" at 13391.46,3515.64 h60
  text "BOARD FINISH:" at 11332.46,3356.64 h60
  text "SILKSCREEN:" at 11487.68,3238.64 h60
  text "X" at 12436.46,3238.64 h60
  text "TOP" at 12562.46,3238.64 h60
  text "BOTTOM" at 13073.46,3238.64 h60
  text "SILKSCREEN COLOR:" at 11487.68,3071.64 h60
  text "X" at 12435.42,3071.64 h60
  text "WHITE" at 12562.46,3071.64 h60
  text "OTHER" at 13073.46,3071.64 h60
  text "SOLDER RESIST COLOR:" at 11487.68,2901.64 h60
  text "X" at 12055.42,2742.44 h60
  text "GREEN" at 12182.46,2742.44 h60
  text "BLUE" at 12773.46,2742.44 h60
  text "OTHER" at 13311.46,2742.44 h60
  text "IMMERSION GOLD (ENIG)" at 12393.46,2553.92 h60
  text "SURFACE FINISH:" at 11332.46,2549.64 h60
  text "X" at 12210,2550 h60
  text "IMM. TIN/SILVER OR EQUIV" at 11662,2392.64 h60
  text "OTHER" at 13093.46,2392.64 h60
  text "ARRAY/PANEL:" at 11332.46,2213.64 h60
  text "CUT AND TRIM PER MECH LAYER 1" at 12393.46,2209.35 h60
  text "N.C. ROUTE" at 12393.46,2057.64 h60
  text "X" at 13072.46,2057.64 h60
  text "V. SCORE" at 13259.46,2057.64 h60
  text "CERTIFICATION:" at 11332.46,1920.64 h60
  text "MATERIALS AND WORKMANSHIP FOR ALL PCBS" at 12057.46,1920.64 h60
  text "TO MEET OR EXCEED THE REQUIREMENTS OF:" at 12057.46,1822.64 h60
  text "X" at 11683.96,1686.13 h60
  text "ANSI IPC-A-600F CLASS ->" at 11822.96,1686.13 h60
  text "X" at 13462.02,1686.13 h60
  text "2" at 13580.96,1686.14 h60
  text "1" at 13265.96,1684.64 h60
  text "3" at 13934.96,1684.64 h60
  text "X" at 11686.02,1526.64 h60
  text "UL 94V-0" at 11822.96,1526.64 h60
  text "X" at 12498.02,1526.64 h60
  text "RoHS" at 12634.96,1526.64 h60
  text "OTHER" at 13279.36,1526.64 h60
  text "PER ORDER" at 13676.42,1526.64 h60
  text "ADDITIONAL REQUIREMENTS:" at 11332.46,1385.64 h60
  text "MICROSECTION:" at 11407.23,1270.64 h60
  text "YES" at 12312.96,1270.64 h60
  text "REQUIRED" at 13174.46,1114.49 h60
  text "BARE BOARD ELEC. TEST:" at 11407.23,1111.64 h60
  text "NONE" at 12712.96,1111.64 h60
  text "X" at 13047.46,1111.64 h60
  text "PER ORDER" at 13766.46,1111.64 h60
  text "MANUFACTURER'S ID/LOGO:" at 11407.23,954.64 h60
  text "RAIL" at 12872.96,950.35 h60
  text "X" at 13247.46,950.35 h60
  text "METAL" at 13364.77,950.35 h60
  text "SILK" at 13876.46,950.35 h60
  text ".Layer_Name" at 577,-858.49 h60
M11 Gerber Information:
  lines w10: -292,-930.17 6308,-930.17 ; -292,-726.83 6310,-726.83 ; -292,-523.5 -292,-1133.5 3713,-1133.5 6310,-1133.5 6310,-523.5 -291.5,-523.5 -291.5,-1133.5 1284,-1133.5 ; 2173,-1133.5 2173,-523.5 ; 3440,-726.83 3440,-523.5 ; 4280,-726.83 4280,-523.5 ; 4902,-1140 4902,-937.17
  text "ALL ARTWORK VIEWED FROM TOP SIDE" at -228.5,-655.67 h60
  text "BOARD #:" at 2248,-655.67 h60
  text ".PRJ_Number" at 2793.5,-655.67 h60
  text "REV:" at 3638,-655.67 h60
  text ".PCB_Rev" at 3929.5,-655.67 h60
  text "SVN REV:" at 4476,-655.67 h60
  text ".VersionControl_RevNumber" at 4982,-655.67 h60
  text "LAYER NAME =" at -228.5,-858.49 h60
  text "PLOT NAME =" at -228.5,-1064.34 h60
  text ".plot_File_Name" at 577,-1064.34 h60
  text "GENERATED    :" at 2250,-1064.34 h60
  text ".Print_Date" at 3119.5,-1064.34 h60
  text ".Print_Time" at 3848.5,-1064.34 h60
  text "TEXAS INSTRUMENTS" at 5113,-1064.34 h60
M12 Stackup:
  text ".Layer_Name" at 577,-858.49 h60
M13 Component Bodies Top:
  text ".Layer_Name" at 577,-858.49 h60
M14 Component Bodies Bottom:
  text ".Layer_Name" at 577,-858.49 h60
M15 Courtyards Top:
  text ".Layer_Name" at 577,-858.49 h60
M16 Courtyards Bottom:
  text ".Layer_Name" at 577,-858.49 h60
Drill Drawing:
  text ".legend" at 6905,675 h60
  text "Drill Table" at 7400,510 h60
  text ".Layer_Name" at 577,-858.49 h60

## Dimensions
0,-25 to 6150,-25 on M2 Board Dimensions
-25,0 to -25,4600 on M2 Board Dimensions

## Text inside footprints (layer, text, board x,y; h text height)
D1: Top Overlay "A" at 720,3920 h40 r90; Top Overlay "K" at 920,3670 h40 r90; M5 Assembly Top "K" at 892.83,3654.57 h60 r90